# Altium PCB ESC.PcbDoc
Units mm, origin at the board's own origin, x right, y up, seen from the top; angles counter-clockwise.
Board outline 60.53 x 43.38 mm, 2 copper layers (Top Layer, Bottom Layer); 45 components, 37 nets, 178 pads, 16 vias.
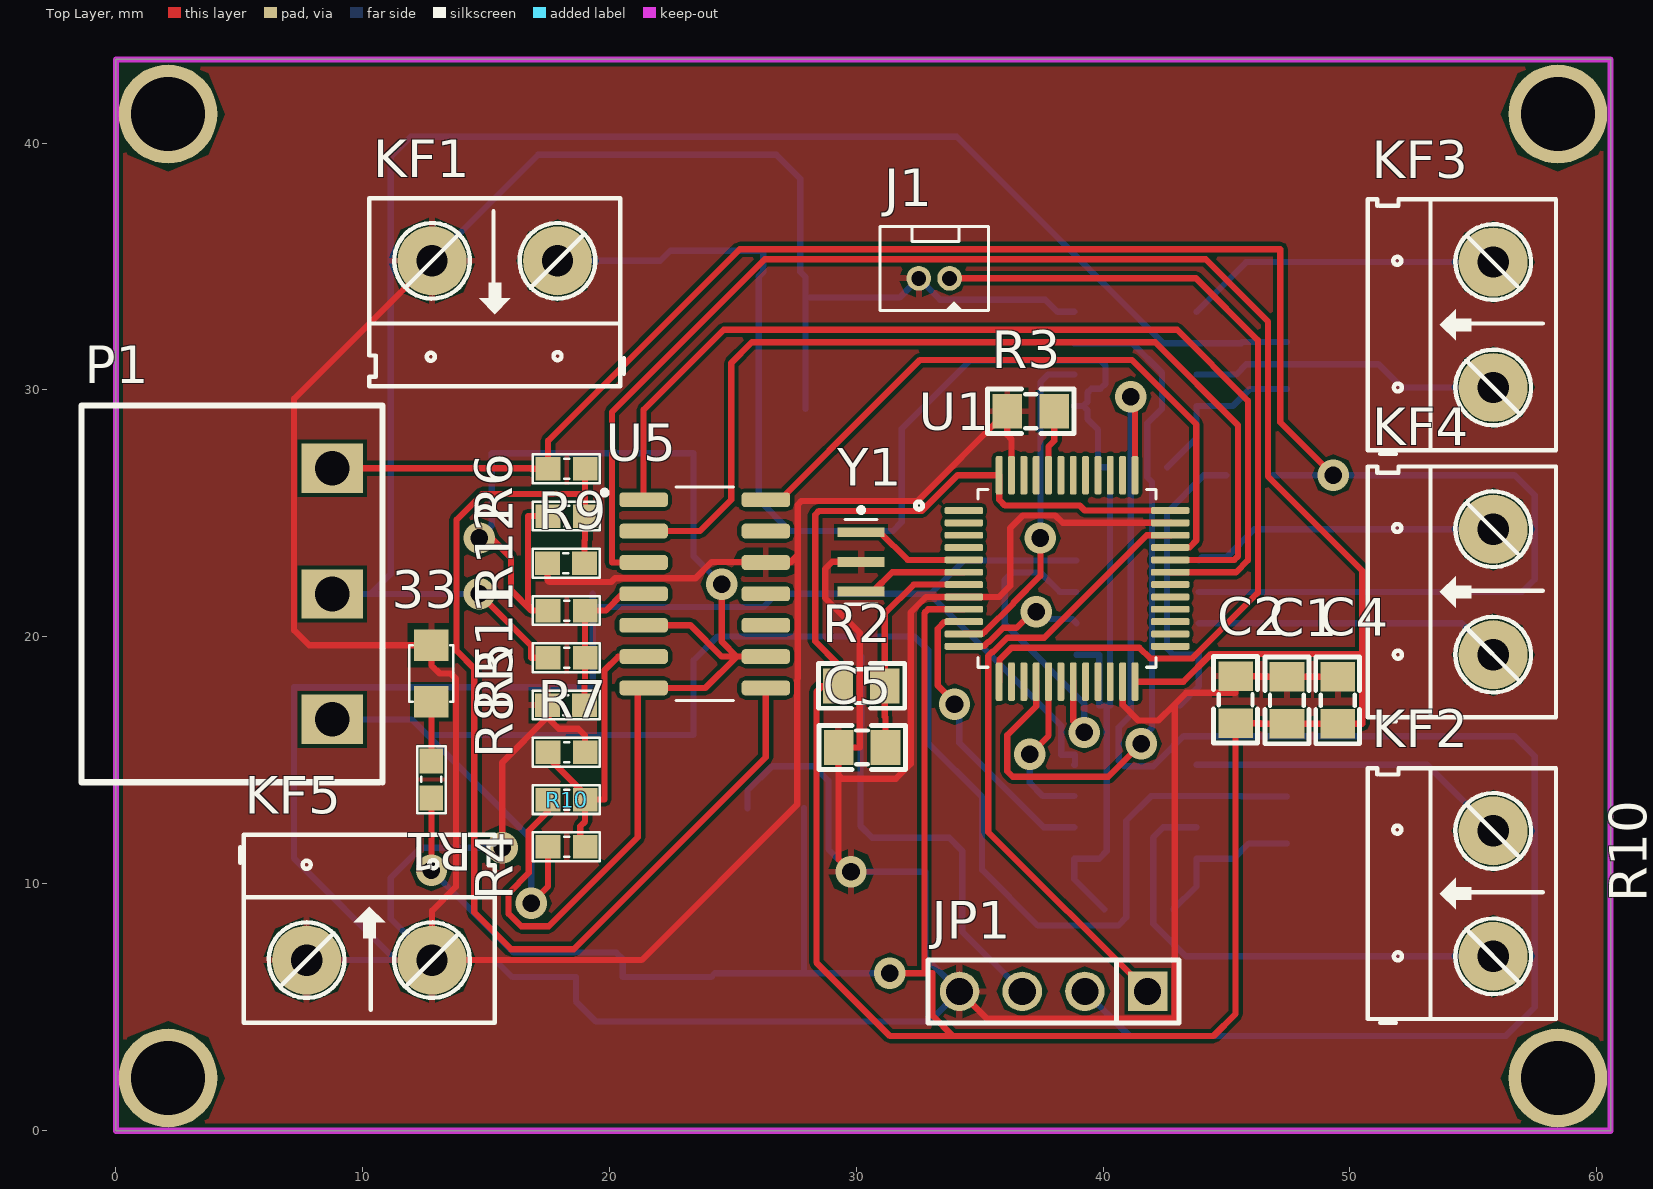
[diagram p0: Top Layer view]
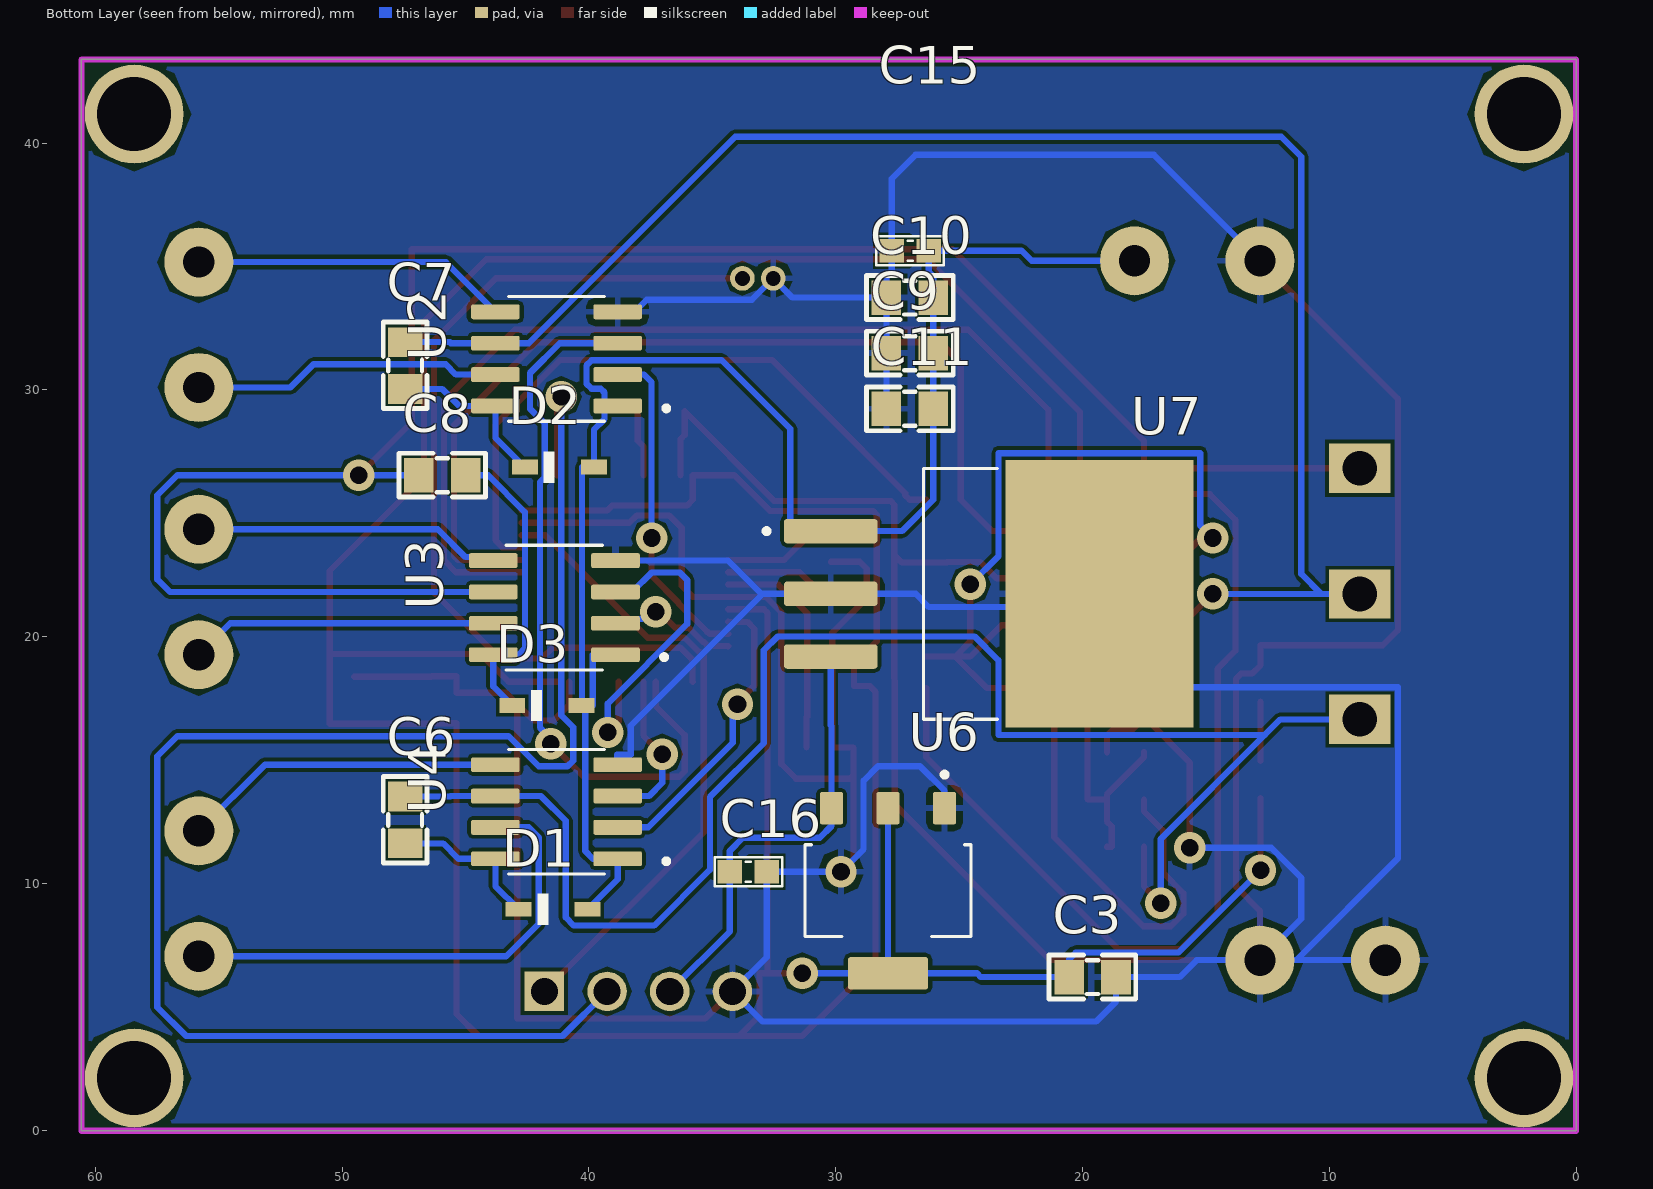
[diagram p1: Bottom Layer view, seen from below]

## Layer stack, top to bottom
Top Solder: solder mask 0.0102, Solder Resist, Dk 3.5
Top Layer: signal copper 0.0356
Dielectric 1: dielectric 0.32, FR-4, Dk 4.8
Bottom Layer: signal copper 0.0356
Bottom Solder: solder mask 0.0102, Solder Resist, Dk 3.5

## Board outline
0.025,0 60.554,0 60.554,43.383 0.025,43.383

## Design rules (kind name [scope] priority, off if disabled: settings)
Clearance [All] p1: gap=0.15 ignorepadtopadclearanceinfootprint=FALSE
PolygonConnect [All] p1: connectstyle=Relief reliefconductorwidth=0.254 reliefentries=4 polygonreliefangle="90 Angle" airgapwidth=0.254
RoutingVias [All] p1: holewidth=0.711 width=1.27 viastyle="Through Hole" minholewidth=0.711 minwidth=1.27 maxholewidth=0.711 maxwidth=1.27
SolderMaskExpansion [All] p1: expansion=0.102 istentingtop=FALSE
Width [All] p1: maxlimit=0.254 minlimit=0.254 preferedwidth=0.254
30 further rules are at their usual default settings.

## Classes and differential pairs
component class Power: C15 C16 U6 U7
component class MCU_ESC: 33 C1 C2 C3 C4 C5 R1 R2 R3 U1 Y1
component class Driver_Fet: C6 C7 C8 C9 C10 C11 D1 D2 D3 U2 U3 U4
component class Designator: J1 JP1 KF1 KF2 KF3 KF4 KF5 P1
component class Back_EMF: R4 R5 R6 R7 R8 R9 R10 R11 R12 U5

## Components (designator, comment, footprint, x,y, rotation, side; value= is the part's Value field where it differs from the comment)
33 "LED 0805" LED-0805-Red 12.802,17.374 r90 top (schematic designator L1)
C1 "104" "tu 0805" 47.447,17.424 r90 top
C2 "104" "tu 0805" 45.364,17.45 r90 top
C3 "104" "tu 0805" 19.609,6.223 r180 bottom
C4 "104" "tu 0805" 49.505,17.424 r90 top
C5 "104" "tu 0805" 30.246,15.516 r180 top
C6 "2.2u" "tu 0805" 47.444,12.588 r270 bottom
C7 "2.2u" "tu 0805" 47.444,30.993 r270 bottom
C8 "2.2u" "tu 0805" 45.943,26.546 r180 bottom
C9 "10u" "tu 0805" 27,31.487 r0 bottom
C10 "10u" "tu 0805" 27,33.739 r0 bottom
C11 "10u" "tu 0805" 27,29.235 r0 bottom
C15 "106" "tu 0603" 26.987,35.636 r0 bottom
C16 "106" "tu 0603" 33.553,10.49 r180 bottom
D1 "1N4148WS" SODFL2512X100N 41.453,8.966 r180 bottom
D2 "1N4148WS" SODFL2512X100N 41.199,26.873 r180 bottom
D3 "1N4148WS" SODFL2512X100N 41.707,17.221 r180 bottom
J1 "653002114822" CON2_50_653002114822_TH_ST 33.162,34.519 r180 top
JP1 "JP 1x4 2.54" "JP 1x4 DT" 41.808,5.639 r180 top
KF1 "CON 2 KF301" "Con 2 KF301 5.08" 17.907,35.23 r180 top
KF2 "CON 2 KF301" "Con 2 KF301 5.08" 55.804,7.061 r90 top
KF3 "CON 2 KF301" "Con 2 KF301 5.08" 55.804,30.099 r90 top
KF4 "CON 2 KF301" "Con 2 KF301 5.08" 55.804,19.279 r90 top
KF5 "CON 2 KF301" "Con 2 KF301 5.08" 7.747,6.909 r0 top
P1 "CON 3 EDG5.08" "CON 3 3EDG5.08" 8.788,16.656 r90 top
R1 "1k" "tro smd 0603" 12.802,14.224 r270 top
R2 "10k" "tro smd 0805" 30.22,17.948 r180 top
R3 "10k" "tro smd 0805" 37.069,29.195 r0 top
R4 "60k" "tro smd 0603" 18.275,11.496 r180 top
R5 "60k" "tro smd 0603" 18.275,19.152 r180 top
R6 "60k" "tro smd 0603" 18.275,26.807 r180 top
R7 "10k" "tro smd 0603" 18.275,15.324 r180 top
R8 "10k" "tro smd 0603" 18.249,17.238 r0 top
R9 "10k" "tro smd 0603" 18.249,22.979 r0 top
R10 "47k" "tro smd 0603" 18.275,13.41 r180 top
R11 "47k" "tro smd 0603" 18.275,21.066 r180 top
R12 "47k" "tro smd 0603" 18.275,24.893 r180 top
U1 "STM32F103C8T6" QFP50P900X900X160-48N 38.544,22.366 r0 top
U2 "IR2101S" SOIC127P600X175-8N 41.315,31.257 r0 bottom
U3 "IR2101S" SOIC127P600X175-8N 41.402,21.184 r0 bottom
U4 "IR2101S" SOIC127P600X175-8N 41.315,12.919 r0 bottom
U5 "LM339D" SOIC127P600X175-14N 23.869,21.742 r0 top
U6 "AMS1117" SOT229P700X180-4N 27.889,9.718 r270 bottom
U7 "LM7805S/NOPB" TO254P1524X483-4N 23.809,21.742 r180 bottom
Y1 "CSTCE8M00G55-R0" OSC_CSTCE8M00G55-R0 30.201,23.038 r270 top

## Footprints (in the part's own frame and the unit in brackets; to place one, negate y for a bottom-side part, rotate by r counter-clockwise, add the part's x,y. Pads: shape width x height; smd on the part's side, far side on the other; paste and mask are expansions set on the pad)
CON2_50_653002114822_TH_ST [mm] "WR-WTB 1.25 mm Male Vertical Shrouded Header"
  round 1 hole 0.6: 1(-0.625,0) 2(0.625,0)
  silkscreen extent -2.2,-2.1 2.2,1.3, body extent -2.12,-2 2.13,1.2, height 4.21
"Con 2 KF301 5.08" [mil]
  round 110 hole 50: 1(0,0) 2(200,0)
  silkscreen extent -106,-100 300,200, body extent -45,-97 255,190, height 335
"CON 3 3EDG5.08" [mm]
  rect 2x2.5 hole 1.4: 1(0,0) 2(5.08,0) 3(10.173,0)
  silkscreen extent -2.54,-2.03 12.71,10.16, body extent -2.5,-1.75 12.67,10.25, height 3.15
"JP 1x4 DT" [mm] "4 pins, 1 row, straight, gold plating"
  rect 1.6x1.6 hole 1.1: 1(0,0)
  round 1.6 hole 1.1: 2(2.54,0) 3(5.08,0) 4(7.62,0)
  silkscreen extent -1.27,-1.27 8.89,1.27, body extent -1.27,-1.27 8.89,1.27, height 8.54
LED-0805-Red [mil]
  rect 50x55 smd: 1(0,0) 2(90,0)
  silkscreen extent 0,-35 90,35, body extent 5,-25 85,25, height 43
OSC_CSTCE8M00G55-R0 [mm]
  rect 0.4x1.9 smd: 1(-1.2,0) 2(0,0) 3(1.2,0)
  silkscreen extent -2.2,-0.65 1.72,0.65, body extent -1.6,-0.65 1.6,0.65, height 0.8
QFP50P900X900X160-48N [mm]
  rrect50% 1.56x0.28 smd: 1(-4.18,2.75) 2(-4.18,2.25) 3(-4.18,1.75) 4(-4.18,1.25) 5(-4.18,0.75) 6(-4.18,0.25) 7(-4.18,-0.25) 8(-4.18,-0.75) 9(-4.18,-1.25) 10(-4.18,-1.75) 11(-4.18,-2.25) 12(-4.18,-2.75) 25(4.18,-2.75) 26(4.18,-2.25) 27(4.18,-1.75) 28(4.18,-1.25) 29(4.18,-0.75) 30(4.18,-0.25) 31(4.18,0.25) 32(4.18,0.75) 33(4.18,1.25) 34(4.18,1.75) 35(4.18,2.25) 36(4.18,2.75)
  rrect50% 0.28x1.56 smd: 13(-2.75,-4.18) 14(-2.25,-4.18) 15(-1.75,-4.18) 16(-1.25,-4.18) 17(-0.75,-4.18) 18(-0.25,-4.18) 19(0.25,-4.18) 20(0.75,-4.18) 21(1.25,-4.18) 22(1.75,-4.18) 23(2.25,-4.18) 24(2.75,-4.18) 37(2.75,4.18) 38(2.25,4.18) 39(1.75,4.18) 40(1.25,4.18) 41(0.75,4.18) 42(0.25,4.18) 43(-0.25,4.18) 44(-0.75,4.18) 45(-1.25,4.18) 46(-1.75,4.18) 47(-2.25,4.18) 48(-2.75,4.18)
  silkscreen extent -6.15,-3.6 3.6,3.6, body extent -4.5,-4.5 4.5,4.5, height 1.6
SODFL2512X100N [mm]
  rect 1.05x0.6 smd: A(1.4,0) C(-1.4,0)
  silkscreen extent -0.63,-0.63 -0.2,0.63, body extent -1.25,-0.62 1.25,0.62, height 1.1
SOIC127P600X175-8N [mm]
  rrect25% 1.97x0.6 smd: 1(-2.475,1.905) 2(-2.475,0.635) 3(-2.475,-0.635) 4(-2.475,-1.905) 5(2.475,-1.905) 6(2.475,-0.635) 7(2.475,0.635) 8(2.475,1.905)
  silkscreen extent -4.54,-2.53 1.95,2.53, body extent -3,-2.5 3,2.5, height 1.75
SOIC127P600X175-14N [mm]
  rrect50% 1.97x0.6 smd: 1(-2.475,3.81) 2(-2.475,2.54) 3(-2.475,1.27) 4(-2.475,0) 5(-2.475,-1.27) 6(-2.475,-2.54) 7(-2.475,-3.81) 8(2.475,-3.81) 9(2.475,-2.54) 10(2.475,-1.27) 11(2.475,0) 12(2.475,1.27) 13(2.475,2.54) 14(2.475,3.81)
  silkscreen extent -4.15,-4.33 1.17,4.33
SOT229P700X180-4N [mm]
  rrect15% 1.31x0.93 smd: 1(-3.345,2.29) 2(-3.345,0) 3(-3.345,-2.29)
  rrect15% 1.31x3.24 smd: 4(3.345,0)
  silkscreen extent -4.8,-3.36 1.86,3.36, body extent -3.5,-3.25 3.5,3.25, height 1.8
TO254P1524X483-4N [mm]
  rrect25% 3.79x0.99 smd: 1(-6.4,2.54) 2(-6.4,0) 3(-6.4,-2.54)
  rect 7.62x10.84 smd paste-6: 4(4.48,0)
  silkscreen extent -9.1,-5.08 0.35,5.08, body extent -7.18,-5.08 7.18,5.08, height 4.65
"tro smd 0603" [mm] "Chip Capacitor, 2-Leads, Body 1,60x0,80mm, IPC Medium Density"
  rect 1x0.95 smd mask+0.076: 1(-0.75,0) 2(0.75,0)
  silkscreen extent -1.35,-0.58 1.37,0.58, body extent -0.82,-0.42 0.82,0.43, height 0.44
"tro smd 0805" [mm]
  rect 1.2x1.4 smd: 1(-0.946,-0.061) 2(0.954,-0.061)
  silkscreen extent -1.75,-0.97 1.75,0.84, body extent -1.56,-0.76 1.44,0.64, height 0.53
"tu 0603" [mm] "Chip Capacitor, 2-Leads, Body 1,60x0,80mm, IPC Medium Density"
  rect 1x0.95 smd mask+0.076: 1(-0.75,0) 2(0.75,0)
  silkscreen extent -1.35,-0.58 1.37,0.58, body extent -0.8,-0.4 0.8,0.4, height 0.9
"tu 0805" [mm] "Compoment SMD 80x50mil"
  rect 1.2x1.4 smd: 1(-0.946,-0.003) 2(0.954,-0.003)
  silkscreen extent -1.75,-0.89 1.75,0.89, body extent -1.01,-0.64 1.01,0.63, height 0.61

## Part data
33: library part "LED 0805 Do", "Dán", Chung_Loai=Dán, Don_Vi=Con, Ma_Hang=MH000897, Ten_Linh_Kien="LED 0805 Màu Đỏ (Red)"
C1 C2 C3 C4 C5: library part "Tu 0805 104 50V 10%", "Dán", Chung_Loai=Dán, Don_Vi=Con, Ma_Hang=MH004551, So_Chan=2, Ten_Linh_Kien="Tụ 0805 104-100nF 10% 50V"
C6 C7 C8 C9 C10 C11: library part "Tu 0805 106 16V 10%", "Dán", Chung_Loai=Dán, Don_Vi=Con, Ma_Hang=MH004553, So_Chan=2, Ten_Linh_Kien="Tụ 0805 106-10uF 10% 16V"
C15 C16: library part "Tu 0603 106 16V 20%", "Dán", Chung_Loai=Dán, Don_Vi=Con, Ma_Hang=MH004848, So_Chan=2, Ten_Linh_Kien="Tụ 0603-10uF 20% 16V"
D1 D2 D3: "Diode Standard 75V 300mA (DC) Surface Mount SOD-323", Package="SOD-323FL-2 ON Semiconductor", Availability="In Stock", MF="ON Semiconductor", MP=1N4148WS, Price=None, Purchase-URL=https://pricing.snapeda.com/search/part/1N4148WS/?ref=eda
J1: library part CON-PLG_2X1-50-ST-TH, "2 Pins, 1 Row 1.25mm Pitch, Straight Connector, male", Alternate Part Number-1=NA, Case/Package=TH-CON, Crimp Part Number=653153128130, Manufacturer=JST, Mating Part Number=653002113322, Manufacturer Part Number=653002114822, Supplier Part Number-1=653002114822, Supplier-1=WURTH
JP1: library part "JP 1x4 2.54 Duc Thang", "Cắm", Chung_Loai=Cắm, Don_Vi=Con, Ma_Hang=MH000903, Ten_Linh_Kien="Jump Đơn Đực 2.54MM 1x40P Thẳng 11MM"
KF1 KF2 KF3 KF4 KF5 P1: "Cắm", Chung_Loai=Cắm, Don_Vi=Con
  KF1 KF2 KF3 KF4 KF5: Ma_Hang=MH000987, Ten_Linh_Kien="CON 2 KF301-2P 5.08MM Xanh Dương"
  P1: Ma_Hang=MH000760, Ten_Linh_Kien="CON 3 2EDG5.08-3P 5.08MM ( Xanh Cong)"
R1: library part "Tro 0603 1% 1k", "Dán", Chung_Loai=Dán, Don_Vi=Con, Ma_Hang=MH006334, So_Chan=2, Ten_Linh_Kien="Trở 0603 1% 1k"
R2 R3: library part "Tro 0805 1% 10k", "Dán", Chung_Loai=Dán, Don_Vi=Con, Ma_Hang=MH005473, So_Chan=2, Ten_Linh_Kien="Trở 0805 1% 10k"
R4 R5 R6 R7 R8 R9: library part "Tro 0603 1% 10k", "Dán", Chung_Loai=Dán, Don_Vi=Con, Ma_Hang=MH006333, So_Chan=2, Ten_Linh_Kien="Trở 0603 1% 10k"
R10 R11 R12: library part "Tro 0603 5% 47k", "Dán", Chung_Loai=Dám, Don_Vi=Con, Ma_Hang=MH007665, So_Chan=2, Ten_Linh_Kien="Trở 0603 5% 47k"
U1: "ARMÂ® CortexÂ®-M3 STM32F1 Microcontroller IC 32-Bit 72MHz 64KB (64K x 8) FLASH 48-LQFP (7x7)", Package="LQFP-48 STMicroelectronics", Availability="In Stock", Check_prices=https://www.snapeda.com/parts/STM32F103C8T6/STMicroelectronics/view-part/?ref=eda, MF=STMicroelectronics, MP=STM32F103C8T6, Price=None, Purchase-URL=https://pricing.snapeda.com/search/part/STM32F103C8T6/?ref=eda, SnapEDA_Link=https://www.snapeda.com/parts/STM32F103C8T6/STMicroelectronics/view-part/?ref=snap
U2 U3 U4: "Half-Bridge Gate Driver IC Non-Inverting 8-SOIC", Package="SOIC-8 Infineon", Availability="In Stock", Check_prices=https://www.snapeda.com/parts/IR2101S/Infineon+Technologies/view-part/?ref=eda, MF="Infineon Technologies", MP=IR2101S, Price=None, Purchase-URL=https://pricing.snapeda.com/search/part/IR2101S/?ref=eda, SnapEDA_Link=https://www.snapeda.com/parts/IR2101S/Infineon+Technologies/view-part/?ref=snap
U5: Package=None, Availability=Unavailable, MP=LM339D, Price=None
U6: "1A LOW DROPOUT VOLTAGE REGULATOR SOT-223", Package="SOT-223 Seeed Technology", Availability="Not in stock", Check_prices=https://www.snapeda.com/parts/AMS1117/Advanced+Monolithic+Systems/view-part/?ref=eda, MF="Advanced Monolithic Systems", MP=AMS1117, Price=None, SnapEDA_Link=https://www.snapeda.com/parts/AMS1117/Advanced+Monolithic+Systems/view-part/?ref=snap
U7: "1.5-A, 30-V, linear voltage regulator", Package="TO-263-3 Texas Instruments", Availability="In Stock", Check_prices=https://www.snapeda.com/parts/LM7805S/NOPB/Texas+Instruments/view-part/?ref=eda, MF="Texas Instruments", MP=LM7805S/NOPB, Price=None, Purchase-URL=https://pricing.snapeda.com/search/part/LM7805S/NOPB/?ref=eda, SnapEDA_Link=https://www.snapeda.com/parts/LM7805S/NOPB/Texas+Instruments/view-part/?ref=snap
Y1: "8 MHz Ceramic Resonator Built in Capacitor 33 pF Â±0.2% -20Â°C ~ 80Â°C Surface Mount", Package="SMD-3 Murata", Check_prices=https://www.snapeda.com/parts/CSTCE8M00G55-R0/Murata+Electronics+North+America/view-part/?ref=eda, MF=Murata, MP=CSTCE8M00G55-R0, SnapEDA_Link=https://www.snapeda.com/parts/CSTCE8M00G55-R0/Murata+Electronics+North+America/view-part/?ref=snap

## Free pads (board coordinates)
  round 4 hole 3: 10(2.134,2.134) 10(2.134,41.173) 10(58.42,2.134) 10(58.42,41.173)

## Via types
v1: diameter 1.27, hole 0.711, Top Layer to Bottom Layer, 16 vias

## Nets (pads, with @x,y where several pads share a name; then routed paths per layer and width w, separated by ;. In a path a pad name is that pad's centre, name@x,y a point inside that pad or via, vN(x,y) a via of type N, cw(c..) or ccw(c..) an arc to the next point about the centre after c; other vN are vias at no path point)
+5: C16.1 JP1.3 U6.3 U7.3 | length 18.1
  Bottom Layer w0.254: U7.3 30.209,16.416 30.179,16.385 U6.3 30.179,12.34 30.658,11.862 33.77,11.862 34.303,11.328 C16.1 34.303,8.064 JP1.3
+16.8: C9.1 C10.1 C11.1 C15.1 D1.A D2.A D3.A KF1.1 U2.1 U3.1 U4.1 U7.1 | length 67.2
  Bottom Layer w0.254: KF1.1 22.073,35.23 22.479,35.636 C15.1 26.237,34.778 26.055,34.595 C10.1 26.055,32.614 C9.1 C11.1 26.055,25.552 27.325,24.282 U7.1 31.486,24.282 31.854,24.65 31.854,28.424 34.629,31.199 39.895,31.199 40.102,30.993 40.102,30.252 39.895,30.045 39.521,30.045 39.372,29.897 39.372,29.525 U2.1@39.199,29.352 ; U2.1 U2.1@39.199,29.352 ; U3.1 39.853,19.279 39.853,17.221 D3.A@40.155,17.221 ; D1.A 38.84,10.179 U4.1 39.84,11.014 40.155,11.328 D3.A@40.155,17.221 ; D3.A D3.A@40.284,17.221 ; U2.1@39.199,29.352 39.372,29.179 39.372,28.82 39.799,28.393 D2.A 40.284,26.873 D3.A@40.284,17.221 ; D3.A@40.155,17.221 D3.A@40.284,17.221
BEMF: R10.2 R11.2 R12.2 U5.5 U5.7 U5.9 | length 58.6
  Top Layer w0.254: v1(14.732,24.003) 15.215,24.003 16.027,23.19 16.027,21.878 16.84,21.065 16.933,21.065 ; R10.2 17.525,12.929 16.748,12.152 16.748,10.443 15.926,9.621 15.926,8.788 16.434,8.28 17.551,8.28 21.158,11.887 21.158,17.932 U5.7 23.901,17.932 25.171,19.202 ; R11.2 16.933,21.065 ; R12.2 16.713,24.893 16.713,21.285 16.933,21.065 ; U5.5 23.292,20.472 24.562,19.202 25.171,19.202 ; v1(24.562,22.123) 24.562,19.812 25.171,19.202 ; U5.9 25.171,19.202
  Bottom Layer w0.254: v1(14.732,24.003) 15.24,24.511 15.24,27.439 23.416,27.439 23.416,23.269 v1(24.562,22.123)
BEMF_A: R4.1 R7.2 R10.1 U5.6 | length 12.6
  Top Layer w0.254: R7.2 17.525,15.114 19.025,13.614 R10.1 ; R4.1 18.827,11.496 18.827,12.326 19.025,12.523 R10.1 ; U5.6 20.371,19.202 19.812,18.644 19.812,13.41 R10.1
BEMF_B: R5.1 R8.2 R11.1 U5.4 | length 6.5
  Top Layer w0.254: R8.2 18.999,18.161 19.025,18.186 R5.1 R11.1 19.863,21.065 20.54,21.742 U5.4
BEMF_C: R6.1 R9.2 R12.1 U5.8 | length 44.1
  Top Layer w0.254: R9.2 18.999,23.901 19.025,23.927 R12.1 19.025,25.781 ; R6.1 19.025,25.781 ; U5.8 26.34,17.932 26.34,15.123 18.563,7.345 16.027,7.345 14.531,8.842 14.531,18.72 13.82,19.431 13.82,24.74 14.861,25.781 19.025,25.781
BOOT: R3.2 U1.44 | length 2.7
  Top Layer w0.254: U1.44 37.794,27.711 38.024,27.941 R3.2
GND: 33.2 C1.2 C2.2 C3.2 C4.2 C5.2 C9.2 C10.2 C11.2 C15.2 C16.2 J1.2 JP1.4 KF1.2 KF5.1 KF5.2 R3.1 R7.1 R8.1 R9.1 U1.8 U1.23 U1.35 U1.47 U2.4 U3.4 U4.4 U5.12 U6.1 U7.2 U7.4 Y1.2 | length 322.7
  Top Layer w0.254: KF1.2 7.239,29.642 7.239,20.269 7.849,19.66 33.2 12.802,18.847 13.132,18.517 13.589,18.517 13.792,18.313 13.792,9.881 12.827,8.915 KF5.2 21.311,6.909 27.613,13.211 27.635,23.317 ; v1(15.672,11.455) 15.672,14.91 17.499,16.737 ; R8.1 17.499,16.737 ; R9.1 17.499,22.301 17.579,22.222 20.081,22.222 20.237,22.377 23.497,22.377 24.155,23.035 25.486,23.035 25.486,23.012 U5.12 27.33,23.012 27.635,23.317 ; R7.1 19.025,16.002 18.745,16.281 17.955,16.281 17.499,16.737 ; v1(29.794,10.49) 29.291,10.993 29.291,14.397 ; Y1.2 29.032,23.038 28.753,22.758 28.753,21.565 30.15,20.168 30.15,15.519 C5.2 29.291,14.397 ; JP1.4 35.281,4.547 42.901,4.547 42.901,17.272 ; U1.47 36.294,28.007 36.124,28.177 R3.1 32.492,25.502 27.784,25.502 27.635,25.353 27.635,23.317 ; U1.23 40.794,17.245 41.427,16.612 42.24,16.612 42.901,17.272 ; U1.35 38.371,24.616 38.072,24.915 36.754,24.915 36.248,24.409 36.248,22.07 35.795,21.616 U1.8 32.843,21.616 32.218,20.991 32.218,14.854 31.612,14.248 29.44,14.248 29.291,14.397 ; 48.463,18.379 C4.2 ; 48.463,18.379 C1.2 46.406,18.379 46.38,18.404 C2.2 45.368,17.737 43.365,17.737 42.901,17.272
  Bottom Layer w0.254: KF5.1 11.354,6.909 ; KF1.2 17.12,39.522 26.772,39.522 27.738,38.557 C15.2 27.738,34.786 27.955,34.569 C10.2 ; v1(15.672,11.455) 12.37,11.455 11.151,10.236 11.151,8.585 KF5.2 ; U7.4 U7.4@19.329,21.206 ; U6.1 25.599,13.763 26.594,14.757 28.296,14.757 28.88,14.173 28.88,11.405 v1(29.794,10.49) C16.2 32.803,7.024 JP1.4 32.969,4.42 19.467,4.42 18.654,5.232 C3.2 16.082,6.22 15.392,6.909 KF5.2 ; 27.955,30.353 C9.2 C10.2 ; C11.2 27.955,30.353 ; U4.4 38.862,14.824 38.862,15.224 38.308,15.224 38.308,16.404 32.969,21.742 ; U2.4 38.155,33.162 37.662,33.655 33.401,33.655 J1.2 31.761,33.742 C10.2 ; U3.4 34.366,23.089 33.02,21.742 32.969,21.742 ; 11.354,6.909 KF5.2 ; 11.354,6.909 7.239,11.024 7.239,17.958 19.329,17.958 U7.4@19.329,21.206 ; U7.4@19.329,21.206 26.232,21.206 26.768,21.742 U7.2 32.969,21.742
NetC6_1: C6.1 P1.1 R4.2 U4.6 | length 66.7
  Top Layer w0.254: v1(16.84,9.217) 17.525,9.902 R4.2
  Bottom Layer w0.254: P1.1 11.996,16.656 12.624,16.027 ; v1(16.84,9.217) 16.84,11.812 12.624,16.027 ; C6.1 45.613,13.534 45.593,13.554 U4.6 41.951,13.554 40.945,12.548 40.945,8.636 40.615,8.306 37.363,8.306 35.103,10.566 35.103,13.513 32.918,15.697 32.918,19.456 32.36,20.015 24.384,20.015 23.419,19.05 23.419,16.027 12.624,16.027
NetC7_1: C7.1 P1.2 R5.2 U2.6 | length 68.3
  Top Layer w0.254: v1(14.732,21.742) 16.84,19.634 16.84,19.152 R5.2
  Bottom Layer w0.254: P1.2 10.338,21.736 ; v1(14.732,21.742) 14.726,21.736 10.338,21.736 ; C7.1 45.639,31.938 45.593,31.892 U2.6 42.443,31.892 34.077,40.259 11.963,40.259 11.151,39.446 11.151,22.549 10.338,21.736
NetC8_1: C8.1 P1.3 R6.2 U3.6 | length 80.9
  Top Layer w0.254: P1.3 16.827,26.829 16.849,26.807 R6.2 17.525,27.939 25.286,35.7 47.181,35.7 47.181,28.689 v1(49.327,26.543)
  Bottom Layer w0.254: U3.6 56.972,21.819 57.48,22.327 57.48,25.73 56.667,26.543 v1(49.327,26.543) C8.1
NetJ1_1: J1.1 U1.13 | length 36.6
  Top Layer w0.254: J1.1 43.764,34.519 46.274,32.009 46.274,21.788 43.613,19.126 41.91,19.126 41.473,19.563 36.295,19.563 35.807,19.075 35.807,18.199 U1.13
NetJP1_1: JP1.1 U1.34 | length 25.7
  Top Layer w0.254: JP1.1 35.357,12.09 35.357,19.228 35.52,19.391 35.552,19.391 36.128,19.967 37.623,19.967 41.772,24.116 U1.34
NetJP1_2: JP1.2 U1.37 | length 65.6
  Top Layer w0.254: v1(41.123,29.718) 41.294,29.547 U1.37
  Bottom Layer w0.254: JP1.2 41.072,3.835 56.312,3.835 57.48,5.004 57.48,15.164 56.667,15.977 43.256,15.977 42.037,14.757 40.869,14.757 40.64,14.986 40.64,16.338 41.123,16.82 v1(41.123,29.718)
NetKF2_1: KF2.1 U4.7 | length 19.7
  Bottom Layer w0.254: U4.7 42.443,12.284 42.037,11.877 42.037,8.382 43.358,7.061 KF2.1
NetKF2_2: KF2.2 U4.5 | length 13.1
  Bottom Layer w0.254: U4.5 53.121,14.824 KF2.2
NetKF3_1: KF3.1 U2.7 | length 12.6
  Bottom Layer w0.254: U2.7 45.39,30.622 45.806,31.039 51.156,31.039 52.095,30.099 KF3.1
NetKF3_2: KF3.2 U2.5 | length 12.8
  Bottom Layer w0.254: U2.5 45.806,35.179 KF3.2
NetKF4_1: KF4.1 U3.7 | length 12.5
  Bottom Layer w0.254: U3.7 54.534,20.549 KF4.1
NetKF4_2: KF4.2 U3.5 | length 12.5
  Bottom Layer w0.254: U3.5 44.023,23.235 45.003,23.235 46.126,24.359 KF4.2
NetL1_1: 33.1 R1.1 | length 2.4
  Top Layer w0.254: R1.1 33.1
NetU1_10: U1.10 U4.2 | length 12.2
  Top Layer w0.254: v1(33.985,17.272) 33.985,17.352 33.307,18.031 33.307,20.33 33.58,20.603 34.351,20.603 U1.10
  Bottom Layer w0.254: v1(33.985,17.272) 34.18,17.078 34.18,15.706 37.602,12.284 U4.2
NetU1_11: U1.11 U2.2 | length 13.4
  Top Layer w0.254: U1.11 34.377,20.129 35.116,20.129 35.186,20.199 35.218,20.199 36.379,21.36 36.379,21.393 37.465,22.479 v1(37.465,24.003)
  Bottom Layer w0.254: v1(37.465,24.003) 37.465,30.318 37.77,30.622 U2.2
NetU1_12: U1.12 U3.2 | length 5.3
  Top Layer w0.254: U1.12 34.377,19.629 35.187,19.629 35.353,19.795 35.385,19.795 35.96,20.371 36.498,20.371 37.142,21.015 v1(37.291,21.015)
  Bottom Layer w0.254: v1(37.291,21.015) 37.566,21.015 37.859,20.722 38.754,20.722 U3.2
NetU1_16: U1.16 U2.3 | length 29.8
  Top Layer w0.254: U1.16 37.294,17.196 36.121,16.023 36.121,14.556 36.347,14.329 40.212,14.329 v1(41.554,15.672)
  Bottom Layer w0.254: U2.3 41.183,31.892 42.39,30.686 42.39,29.239 41.797,28.645 41.797,26.458 41.986,26.269 41.986,16.329 41.554,15.897 v1(41.554,15.672)
NetU1_17: U1.17 U4.3 | length 6.4
  Top Layer w0.254: v1(37.033,15.241) 37.794,16.002 U1.17
  Bottom Layer w0.254: v1(37.033,15.241) 37.033,14.087 37.567,13.554 U4.3
NetU1_19: U1.19 U3.3 | length 13.1
  Top Layer w0.254: U1.19 38.794,16.578 v1(39.243,16.129)
  Bottom Layer w0.254: U3.3 38.252,21.819 37.465,22.606 36.322,22.606 36.017,22.301 36.017,20.523 39.243,17.297 v1(39.243,16.129)
NetU1_31: U1.31 U5.1 | length 40.5
  Top Layer w0.254: U5.1 21.394,29.192 24.638,32.436 43.002,32.436 45.87,29.568 45.87,23.098 45.389,22.616 U1.31
NetU1_32: U1.32 U5.2 | length 40
  Top Layer w0.254: U5.2 23.673,24.282 24.943,25.552 24.943,31.09 25.781,31.928 42.113,31.928 45.466,28.575 45.466,23.265 45.317,23.116 U1.32
NetU1_33: U1.33 U5.14 | length 26.8
  Top Layer w0.254: U5.14 27.017,25.552 27.188,25.724 27.188,25.817 30.582,29.21 32.588,31.217 41.168,31.217 43.781,28.603 43.781,23.903 43.508,23.629 42.737,23.629 U1.33
NRST: C5.1 R2.1 U1.7 | length 9.1
  Top Layer w0.254: C5.1 31.191,16.739 31.166,16.764 R2.1 31.166,20.955 32.327,22.116 U1.7
OSC_IN: U1.5 Y1.1 | length 4.6
  Top Layer w0.254: Y1.1 30.963,24.238 32.084,23.116 U1.5
OSC_OUT: U1.6 Y1.3 | length 4.5
  Top Layer w0.254: Y1.3 30.683,21.838 31.462,22.616 U1.6
VBA: C6.2 D1.C U4.8 | length 6.4
  Bottom Layer w0.254: D1.C 43.79,9.903 U4.8 45.288,11.014 45.909,11.634 C6.2
VBB: C7.2 D2.C U2.8 | length 6.9
  Bottom Layer w0.254: D2.C 43.79,28.064 U2.8 45.263,29.352 45.949,30.038 C7.2
VBC: C8.2 D3.C U3.8 | length 12.3
  Bottom Layer w0.254: D3.C 43.877,17.991 U3.8 42.85,19.279 42.596,19.533 42.596,25.054 44.084,26.543 C8.2
VCC: C1.1 C2.1 C3.1 C4.1 R1.2 R2.2 U1.9 U1.24 U1.36 U1.48 U5.3 U6.2 U6.4 | length 187.4
  Top Layer w0.254: v1(12.802,10.541) R1.2 ; U5.3 20.117,23.012 20.117,29.108 26.304,35.296 44.156,35.296 46.678,32.773 46.678,26.499 50.495,22.682 50.495,19.304 ; v1(31.369,6.373) 32.766,6.373 ; U1.9 32.915,21.116 32.766,20.968 32.766,6.373 ; U1.24 43.256,18.186 44.374,19.304 50.495,19.304 ; U1.36 39.265,25.116 39.062,25.319 36.027,25.319 35.794,25.552 U1.48 34.108,26.546 32.659,25.098 28.495,25.098 28.346,24.949 28.346,19.817 29.266,18.898 R2.2 28.626,18.009 28.397,17.78 28.397,6.807 31.369,3.835 33.909,3.835 ; 32.766,6.373 33.096,6.373 33.096,4.648 33.909,3.835 ; 33.909,3.835 44.475,3.835 45.368,4.728 C2.1 46.38,16.504 46.406,16.479 C1.1 48.463,16.479 C4.1 50.495,16.479 50.495,19.304
  Bottom Layer w0.254: v1(12.802,10.541) 16.129,7.214 20.295,7.214 20.554,6.954 C3.1 24.13,6.22 24.284,6.373 U6.4 ; U6.2 U6.4 ; v1(31.369,6.373) U6.4
pads on no net: U1.1 U1.2 U1.3 U1.4 U1.14 U1.15 U1.18 U1.20 U1.21 U1.22 U1.25 U1.26 U1.27 U1.28 U1.29 U1.30 U1.38 U1.39 U1.40 U1.41 U1.42 U1.43 U1.45 U1.46 U5.10 U5.11 U5.13

## Polygon pours and split planes (outlines as drawn)
GND on Bottom Layer "GND_L02_P000" (solid, pour order 0): 0.025,43.383 60.554,43.383 60.554,0 0.025,0
GND on Top Layer "GND_L01_P001" (solid, pour order 1): 0.025,43.383 60.554,43.383 60.554,0 0.025,0

## Keep-outs
Keep-Out Layer:
  the board outline again, w0.254